# Altium PCB PCB1.PcbDoc
Units mm, origin at the board's own origin, x right, y up, seen from the top; angles counter-clockwise.
Board outline 53.09 x 47.62 mm, 2 copper layers (Top Layer, Bottom Layer); 3 components, 10 nets, 58 pads, 1 vias.
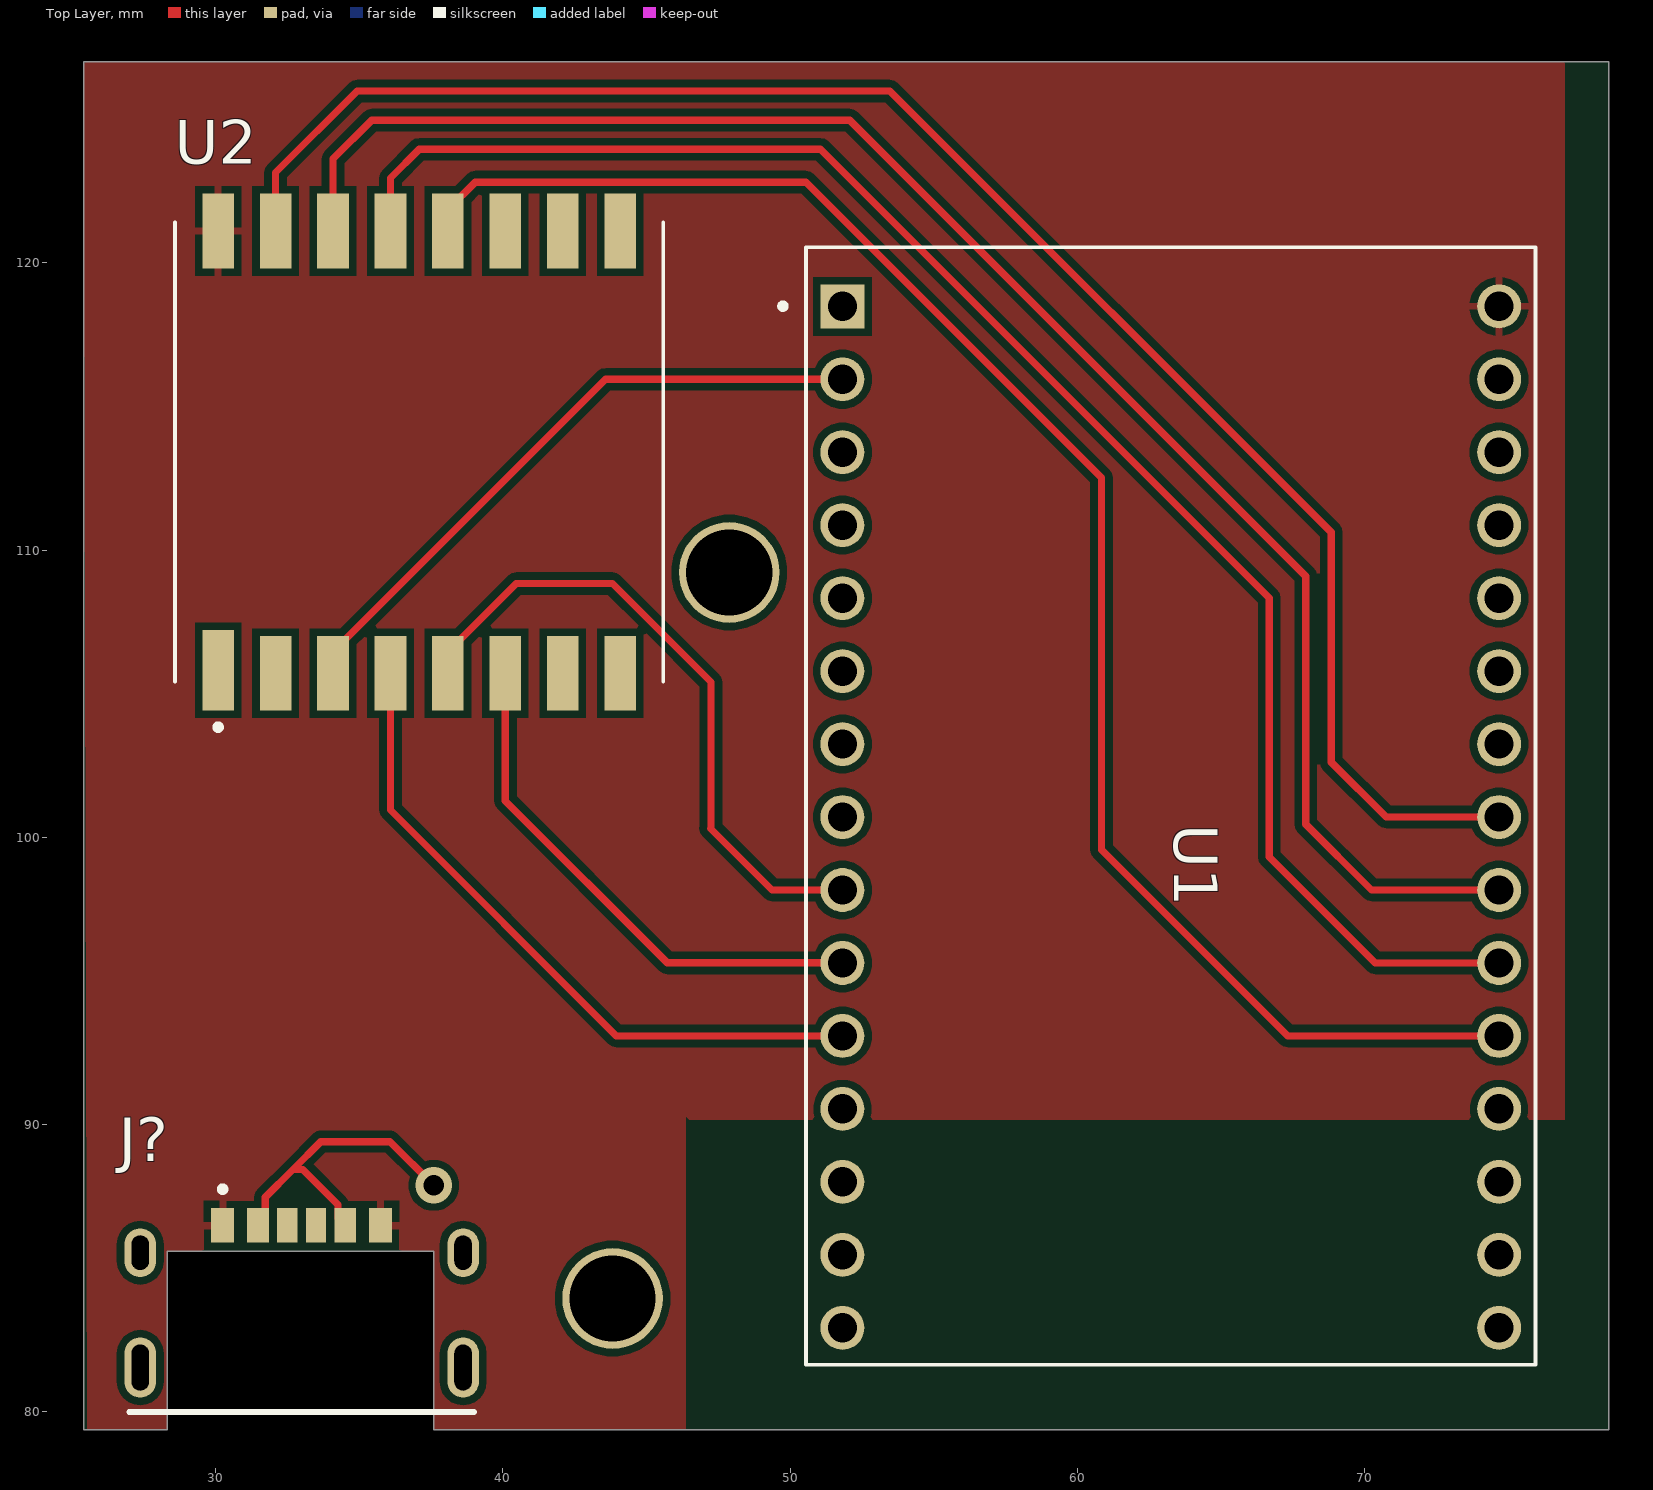
[diagram p0: Top Layer view]
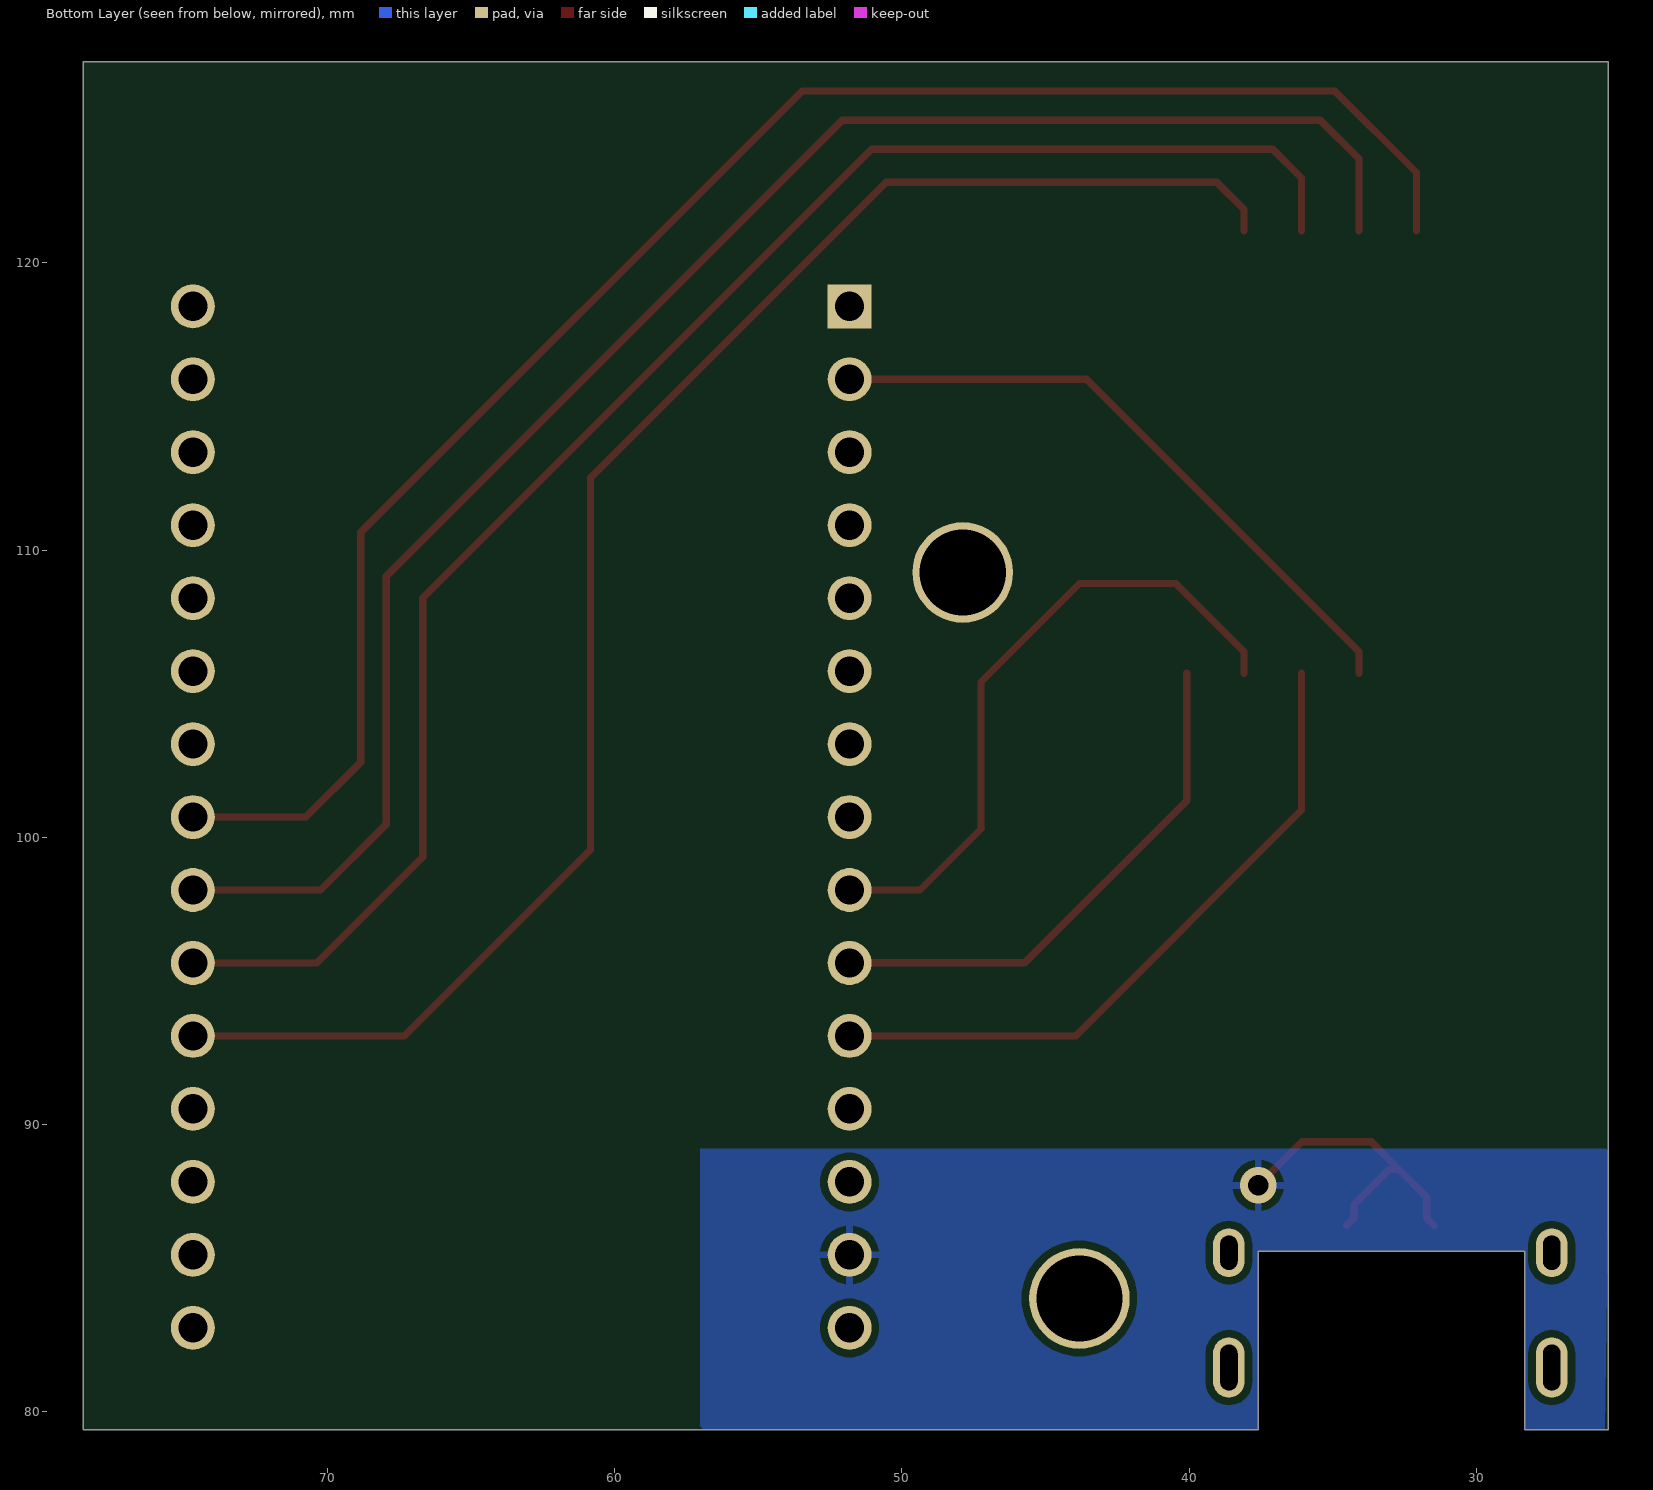
[diagram p1: Bottom Layer view, seen from below]

## Layer stack, top to bottom
Top Solder: solder mask 0.0102, Solder Resist, Dk 3.5
Top Layer: signal copper 0.0356
Dielectric 1: dielectric 0.32, FR-4, Dk 4.8
Bottom Layer: signal copper 0.0356
Bottom Solder: solder mask 0.0102, Solder Resist, Dk 3.5

## Board outline
28.321,79.375 28.321,85.598 37.592,85.598 37.592,79.375 78.486,79.375 78.486,127 25.4,127 25.4,79.375

## Design rules (kind name [scope] priority, off if disabled: settings)
Clearance [All] p1: gap=0.254 ignorepadtopadclearanceinfootprint=FALSE except(0: Arc-Hole Track-Hole SMDPad-Hole THPad-Hole Via-Hole Fill-Hole Poly-Hole Region-Hole Text-Hole)
PolygonConnect [All] p1: connectstyle=Relief reliefconductorwidth=0.254 reliefentries=4 polygonreliefangle="90 Angle" airgapwidth=0.254
RoutingVias [All] p1: holewidth=0.711 width=1.27 viastyle="Through Hole" minholewidth=0.711 minwidth=1.27 maxholewidth=0.711 maxwidth=1.27
SolderMaskExpansion [All] p1: expansion=0.102 istentingtop=FALSE
Width [All] p1: maxlimit=0.254 minlimit=0.254 preferedwidth=0.254
30 further rules are at their usual default settings.

## Classes and differential pairs
component class Sheet2: U1 U2

## Components (designator, comment, footprint, x,y, rotation, side; value= is the part's Value field where it differs from the comment)
J? "USB4515-GF-A_REVA" GCT_USB4515-GF-A_REVA 32.992,81.542 r0 top
U1 "ESP32-C3-DEVKITM-1" XCVR_ESP32-C3-DEVKITM-1 63.246,101.092 r0 top
U2 "RA-02_LORA" MODULE_RA-02_LORA 37.084,113.411 r90 top

## Footprints (in the part's own frame and the unit in brackets; to place one, negate y for a bottom-side part, rotate by r counter-clockwise, add the part's x,y. Pads: shape width x height; smd on the part's side, far side on the other; paste and mask are expansions set on the pad)
GCT_USB4515-GF-A_REVA [mm]
  rect 0.7x1.2 smd: A5(-0.5,4.95) B5(0.5,4.95)
  rect 0.76x1.2 smd: A9(1.52,4.95) B9(-1.52,4.95)
  rect 0.8x1.2 smd: A12(2.75,4.95) B12(-2.75,4.95)
  oval 1.1x2.1 hole 0.6 slot 1.6 at 90 deg: S1(-5.62,0) S2(5.62,0)
  oval 1.1x1.7 hole 0.6 slot 1.2 at 90 deg: S3(-5.62,4) S4(5.62,4)
  silkscreen extent -6,-1.55 6,6.31
MODULE_RA-02_LORA [mm]
  rect 2.8x1.1 smd: 1(-7.6,7)
  rect 2.6x1.1 smd: 2(-7.7,5) 3(-7.7,3) 4(-7.7,1) 5(-7.7,-1) 6(-7.7,-3) 7(-7.7,-5) 8(-7.7,-7) 9(7.7,-7) 10(7.7,-5) 11(7.7,-3) 12(7.7,-1) 13(7.7,1) 14(7.7,3) 15(7.7,5) 16(7.7,7)
  silkscreen extent -9.68,-8.5 8,8.5, body extent -8,-8.5 8,8.5, height 3.3
XCVR_ESP32-C3-DEVKITM-1 [mm]
  rect 1.53x1.53 hole 1.02: 1(-11.43,17.395)
  round 1.53 hole 1.02: 2(-11.43,14.855) 3(-11.43,12.315) 4(-11.43,9.775) 5(-11.43,7.235) 6(-11.43,4.695) 7(-11.43,2.155) 8(-11.43,-0.385) 9(-11.43,-2.925) 10(-11.43,-5.465) 11(-11.43,-8.005) 12(-11.43,-10.545) 13(-11.43,-13.085) 14(-11.43,-15.625) 15(-11.43,-18.165) 16(11.43,-18.165) 17(11.43,-15.625) 18(11.43,-13.085) 19(11.43,-10.545) 20(11.43,-8.005) 21(11.43,-5.465) 22(11.43,-2.925) 23(11.43,-0.385) 24(11.43,2.155) 25(11.43,4.695) 26(11.43,7.235) 27(11.43,9.775) 28(11.43,12.315) 29(11.43,14.855) 30(11.43,17.395)
  silkscreen extent -13.6,-19.46 12.7,19.46, body extent -12.7,-19.94 12.7,24.78, height 7.14

## Part data
J? U1: Package=None, Availability=Unavailable, Price=None
  J?: MF="{'manufacturer': u'Global Connector Technology'}", MP=USB4515-GF-A_REVA
  U1: MF="{'manufacturer': u'Espressif Systems'}", MP=ESP32-C3-DEVKITM-1
U2: "Ra-02 LoRa RF M5Stack Platform Evaluation Expansion Board", Package=None, Availability=Unavailable, MF="{'manufacturer': u'AI-Thinker'}", MP=RA-02_LORA, Price=None

## Free pads (board coordinates)
  round 3.5 hole 3: 4(43.815,83.947) 5(47.879,109.22)

## Via types
v1: diameter 1.27, hole 0.711, Top Layer to Bottom Layer, 1 vias

## Nets (pads, with @x,y where several pads share a name; then routed paths per layer and width w, separated by ;. In a path a pad name is that pad's centre, name@x,y a point inside that pad or via, vN(x,y) a via of type N, cw(c..) or ccw(c..) an arc to the next point about the centre after c; other vN are vias at no path point)
3V3_vcc: U1.2 U2.3 | length 22.4
  Top Layer w0.254: U2.3 34.084,106.461 43.57,115.947 U1.2
5V_VDC: J?.A9 J?.B9 U1.14 | length 11.3
  Top Layer w0.254: J?.B9 31.72,86.74 31.72,87.473 32.687,88.44 ; J?.A9 34.258,86.745 34.258,87.214 33.032,88.44 32.687,88.44 ; v1(37.592,87.884) 36.068,89.408 33.655,89.408 32.687,88.44
DIO0: U1.9 U2.5 | length 22.9
  Top Layer w0.254: U2.5 38.084,106.461 40.462,108.839 43.815,108.839 47.244,105.41 47.244,100.33 47.222,100.308 49.363,98.167 U1.9
DIO1: U1.10 U2.6 | length 18.5
  Top Layer w0.254: U2.6 40.084,101.267 45.72,95.631 51.812,95.631 U1.10
GND: J?.A12 J?.B12 U1.30 U2.16
MISO: U1.21 U2.13 | length 57.9
  Top Layer w0.254: U2.13 36.084,122.952 37.084,123.952 51.054,123.952 66.675,108.331 66.675,99.314 70.362,95.627 U1.21
MOSI: U1.22 U2.14 | length 59.8
  Top Layer w0.254: U2.14 34.084,123.619 35.433,124.968 52.07,124.968 67.945,109.093 67.945,100.457 70.235,98.167 U1.22
NSS: U1.23 U2.15 | length 61
  Top Layer w0.254: U2.15 32.084,123.143 34.925,125.984 53.467,125.984 68.834,110.617 68.834,102.616 70.743,100.707 U1.23
RST: U1.11 U2.4 | length 23.8
  Top Layer w0.254: U2.4 36.084,100.949 43.946,93.087 U1.11
SPI_CLK: U1.20 U2.12 | length 57.6
  Top Layer w0.254: U2.12 38.084,121.861 39.032,122.809 50.546,122.809 60.833,112.522 60.833,99.568 67.314,93.087 U1.20
pads on no net: J?.A5 J?.B5 J?.S1 J?.S2 J?.S3 J?.S4 U1.1 U1.3 U1.4 U1.5 U1.6 U1.7 U1.8 U1.12 U1.13 U1.15 U1.16 U1.17 U1.18 U1.19 U1.24 U1.25 U1.26 U1.27 U1.28 U1.29 U2.1 U2.2 U2.7 U2.8 U2.9 U2.10 U2.11

## Polygon pours and split planes (outlines as drawn)
5V_VDC on Bottom Layer "NONET_L02_P-001" (solid, pour order 1): 25.395,89.154 57.023,89.154 57.023,79.502 56.896,79.375 25.527,79.375
GND on Top Layer "NONET_L02_P-001" (solid, pour order 0): 25.4,127 76.835,127 76.962,127.127 76.962,90.17 46.482,90.17 46.355,90.297 46.355,79.375 25.527,79.375

## Other copper
Top Layer:
  pour cut-out: 28.321,79.502 28.321,85.598 37.592,85.598 37.592,79.375
Bottom Layer:
  pour cut-out: 28.321,85.598 37.592,85.598 37.592,79.375 28.321,79.375

## Text inside footprints (layer, text, board x,y; h text height)
J?: Mechanical 13 "PCB EDGE" at 39.632,80.142 h0.41